# EAGLE board acdimmer_mosfet (EAGLE 7.2.0)
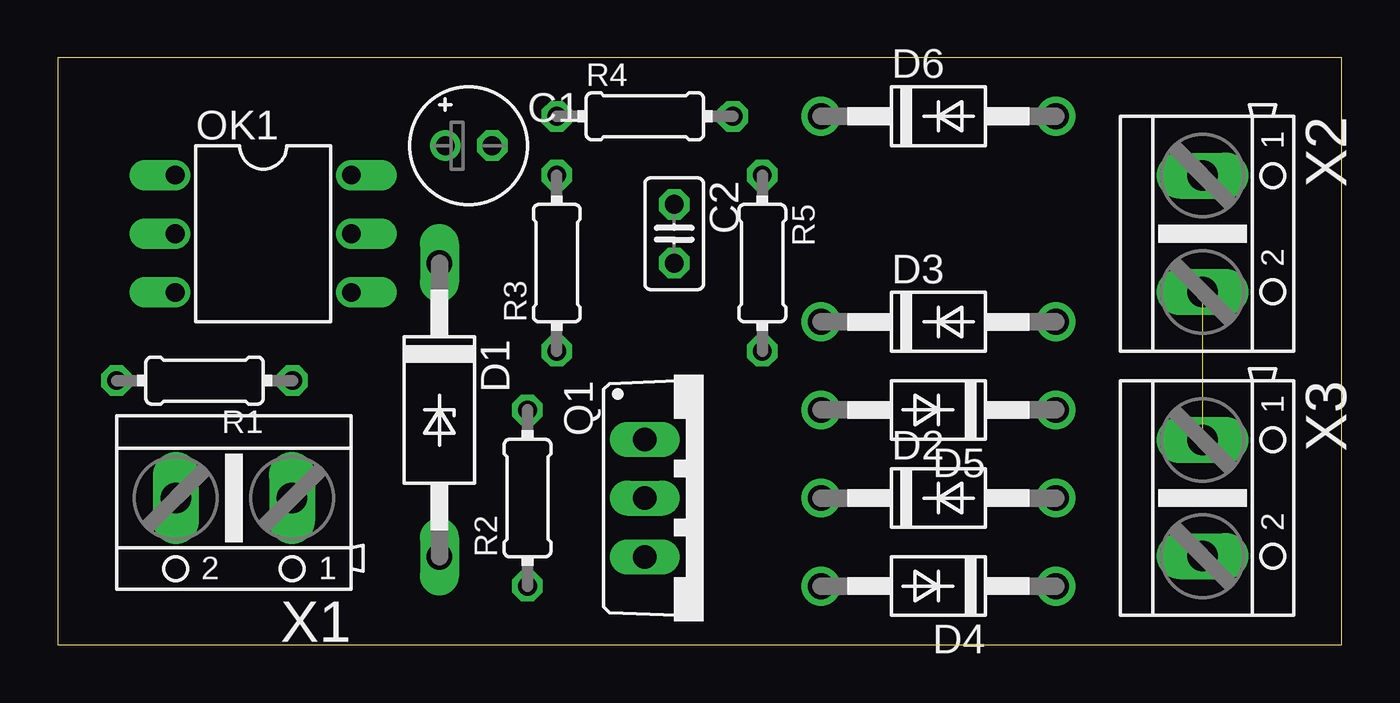
[diagram p0: board, top side]
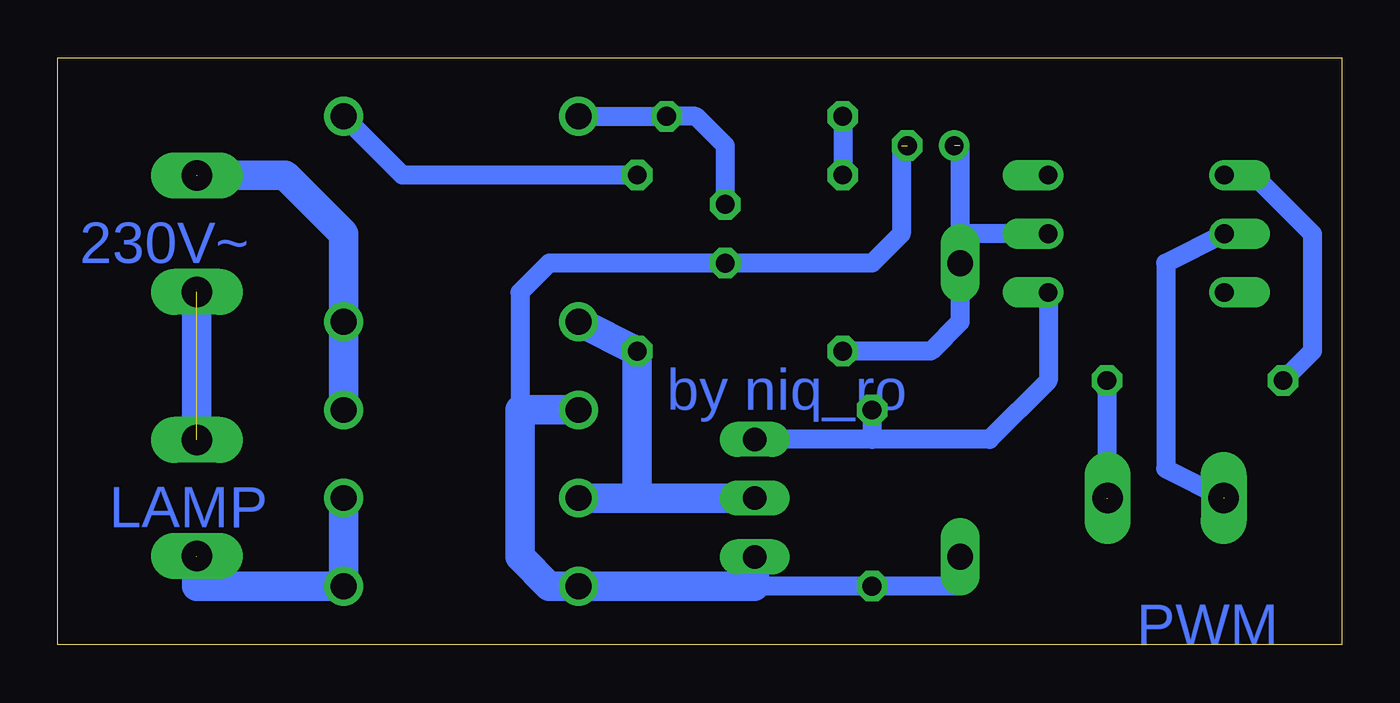
[diagram p1: board, bottom side, seen from below]

Size 55.55 x 25.39 mm. Coordinates in mm from the lower left corner, seen from the top.
Outline: 0,0 55.55,0 55.55,25.39 0,25.39 0,0
Copper layers (1*16): Top 0.035mm / dielectric 1.5mm / Bottom 0.035mm
Design rules "default": minimum track width 10mil, minimum drill 24mil, track to track 8mil, track to pad 8mil, pad to pad 8mil, via to via 8mil, smd to smd 8mil, copper to edge 40mil, drill to drill 8mil, minimum pad ring 10mil, minimum via ring 8mil, stop-mask expansion 4mil, vias tented up to drill 0mil, thermal gap 10mil

## Footprints (pad centres in the part's own frame; a part is rotated, then mirrored left to right if it is on the bottom)
E2-5 = drill 0.813 pad 1.27: + -1.016,0 | drill 0.813 pad 1.27 octagon: - 1.016,0
C025-025X050 = drill 0.813 octagon: 1 -1.27,0; 2 1.27,0
P1Z12 = drill 1.118 long: A 6.35,0; C -6.35,0
DO41-10 = drill 1.118: A 5.08,0; C -5.08,0
DIL06 = drill 0.813 offset: 1 -2.54,-3.81; 2 0,-3.81; 3 2.54,-3.81; 4 2.54,3.81; 5 0,3.81; 6 -2.54,3.81
TO220BV = drill 1.016 long: D 0,-2.54; G -2.54,-2.54; S 2.54,-2.54
0204/7 = drill 0.813 octagon: 1 -3.81,0; 2 3.81,0
AK500/2 = drill 1.321 long: 1 -2.515,0; 2 2.515,0

## Placement (x,y rotation side)
C1  [E2-5]  17.78,21.59 0 top
C2  [C025-025X050]  26.67,17.78 270 top
D1  ZY  [P1Z12]  16.51,10.16 270 top
D2  [DO41-10]  38.1,6.35 0 top
D3  [DO41-10]  38.1,13.97 0 top
D4  [DO41-10]  38.1,2.54 180 top
D5  [DO41-10]  38.1,10.16 180 top
D6  [DO41-10]  38.1,22.86 0 top
OK1  4N35  [DIL06]  8.89,17.78 270 top
Q1  [TO220BV]  27.94,6.35 270 top
R1  [0204/7]  6.35,11.43 180 top
R2  [0204/7]  20.32,6.35 90 top
R3  [0204/7]  21.59,16.51 90 top
R4  [0204/7]  25.4,22.86 0 top
R5  [0204/7]  30.48,16.51 270 top
X1  [AK500/2]  7.62,6.35 180 top
X2  [AK500/2]  49.53,17.78 270 top
X3  [AK500/2]  49.53,6.35 270 top

## Library data of the parts
C1 C2 R1-R5 = rcl
D1-D6 = diode
OK1 = optocoupler; MF: FAIRCHILD SEMICONDUCTOR; MPN: 4N35; OC_FARNELL: 1328375; OC_NEWARK: 72K9946
Q1 = transistor-power
X1-X3 = con-ptr500; OC_FARNELL: unknown; OC_NEWARK: unknown

## Nets
GND: C1.- C2.2 D1.A D4.A D5.A Q1.S R2.1
N$1: R1.1 X1.1
N$3: OK1.2 X1.2
N$4: OK1.4 Q1.G R2.2
N$5: C1.+ D1.C OK1.5 R3.1
N$6: R3.2 R4.1
N$8: D6.A R5.1
N$9: C2.1 D6.C R4.2
N$10: OK1.1 R1.2
N$13: D2.C D3.C Q1.D R5.2
N$16: D2.A D4.C X3.2
N$17: D3.A D5.C X2.1
N$18: X2.2 X3.1

## Tracks (layer width: path | path; a pad name or v marks a point on that pad's centre or on a via)
GND  (1 unrouted)
  Bottom 0.813: 35.56,10.16 35.56,15.24 34.29,16.51 C2.2 20.32,16.51 19.05,17.78 19.05,21.59 | 25.4,2.54 R2.1 16.51,2.54 D1.A
  Bottom 1.27: D5.A 35.56,10.16 35.56,3.81 34.29,2.54 D4.A 25.4,2.54 Q1.S
N$1  (1 unrouted)
  Bottom 0.813: R1.1 10.16,6.35
N$3  (1 unrouted)
  Bottom 0.813: OK1.2 7.62,16.51 7.62,7.62 5.08,6.35
N$4
  Bottom 0.813: R2.2 20.32,8.89 | 20.32,8.89 Q1.G | OK1.4 12.7,11.43 15.24,8.89 20.32,8.89
N$5  (1 unrouted)
  Bottom 0.813: R3.1 17.78,12.7 16.51,13.97 D1.C 16.51,17.78 | 16.51,21.59 16.51,17.78 | OK1.5 16.51,17.78
N$6
  Bottom 0.813: R4.1 R3.2
N$7
  Bottom 1.27: 49.53,15.24 49.53,8.89
N$8
  Bottom 0.813: R5.1 40.64,20.32 D6.A
N$9
  Bottom 0.813: D6.C R4.2 27.94,22.86 26.67,21.59 C2.1
N$10
  Bottom 0.813: R1.2 1.27,12.7 1.27,17.78 3.81,20.32 OK1.1
N$13
  Bottom 1.27: D3.C R5.2 30.48,6.35 | 30.48,6.35 D2.C | Q1.D 30.48,6.35
N$16  (1 unrouted)
  Bottom 1.27: 49.53,3.81 49.53,2.54 D4.C D2.A
N$17  (1 unrouted)
  Bottom 1.27: D5.C D3.A 43.18,17.78 45.72,20.32 49.53,20.32
N$18  (1 unrouted)

## Text on the board
Bottom: 230V~ | by niq_ro | LAMP | PWM